# Altium PCB watch.PcbDoc
Units mm, origin at the board's own origin, x right, y up, seen from the top; angles counter-clockwise.
Board outline 35.56 x 36.83 mm, 2 copper layers (Top, Bottom), stack 1.572 mm thick; 52 components, 44 nets, 236 pads, 69 vias.
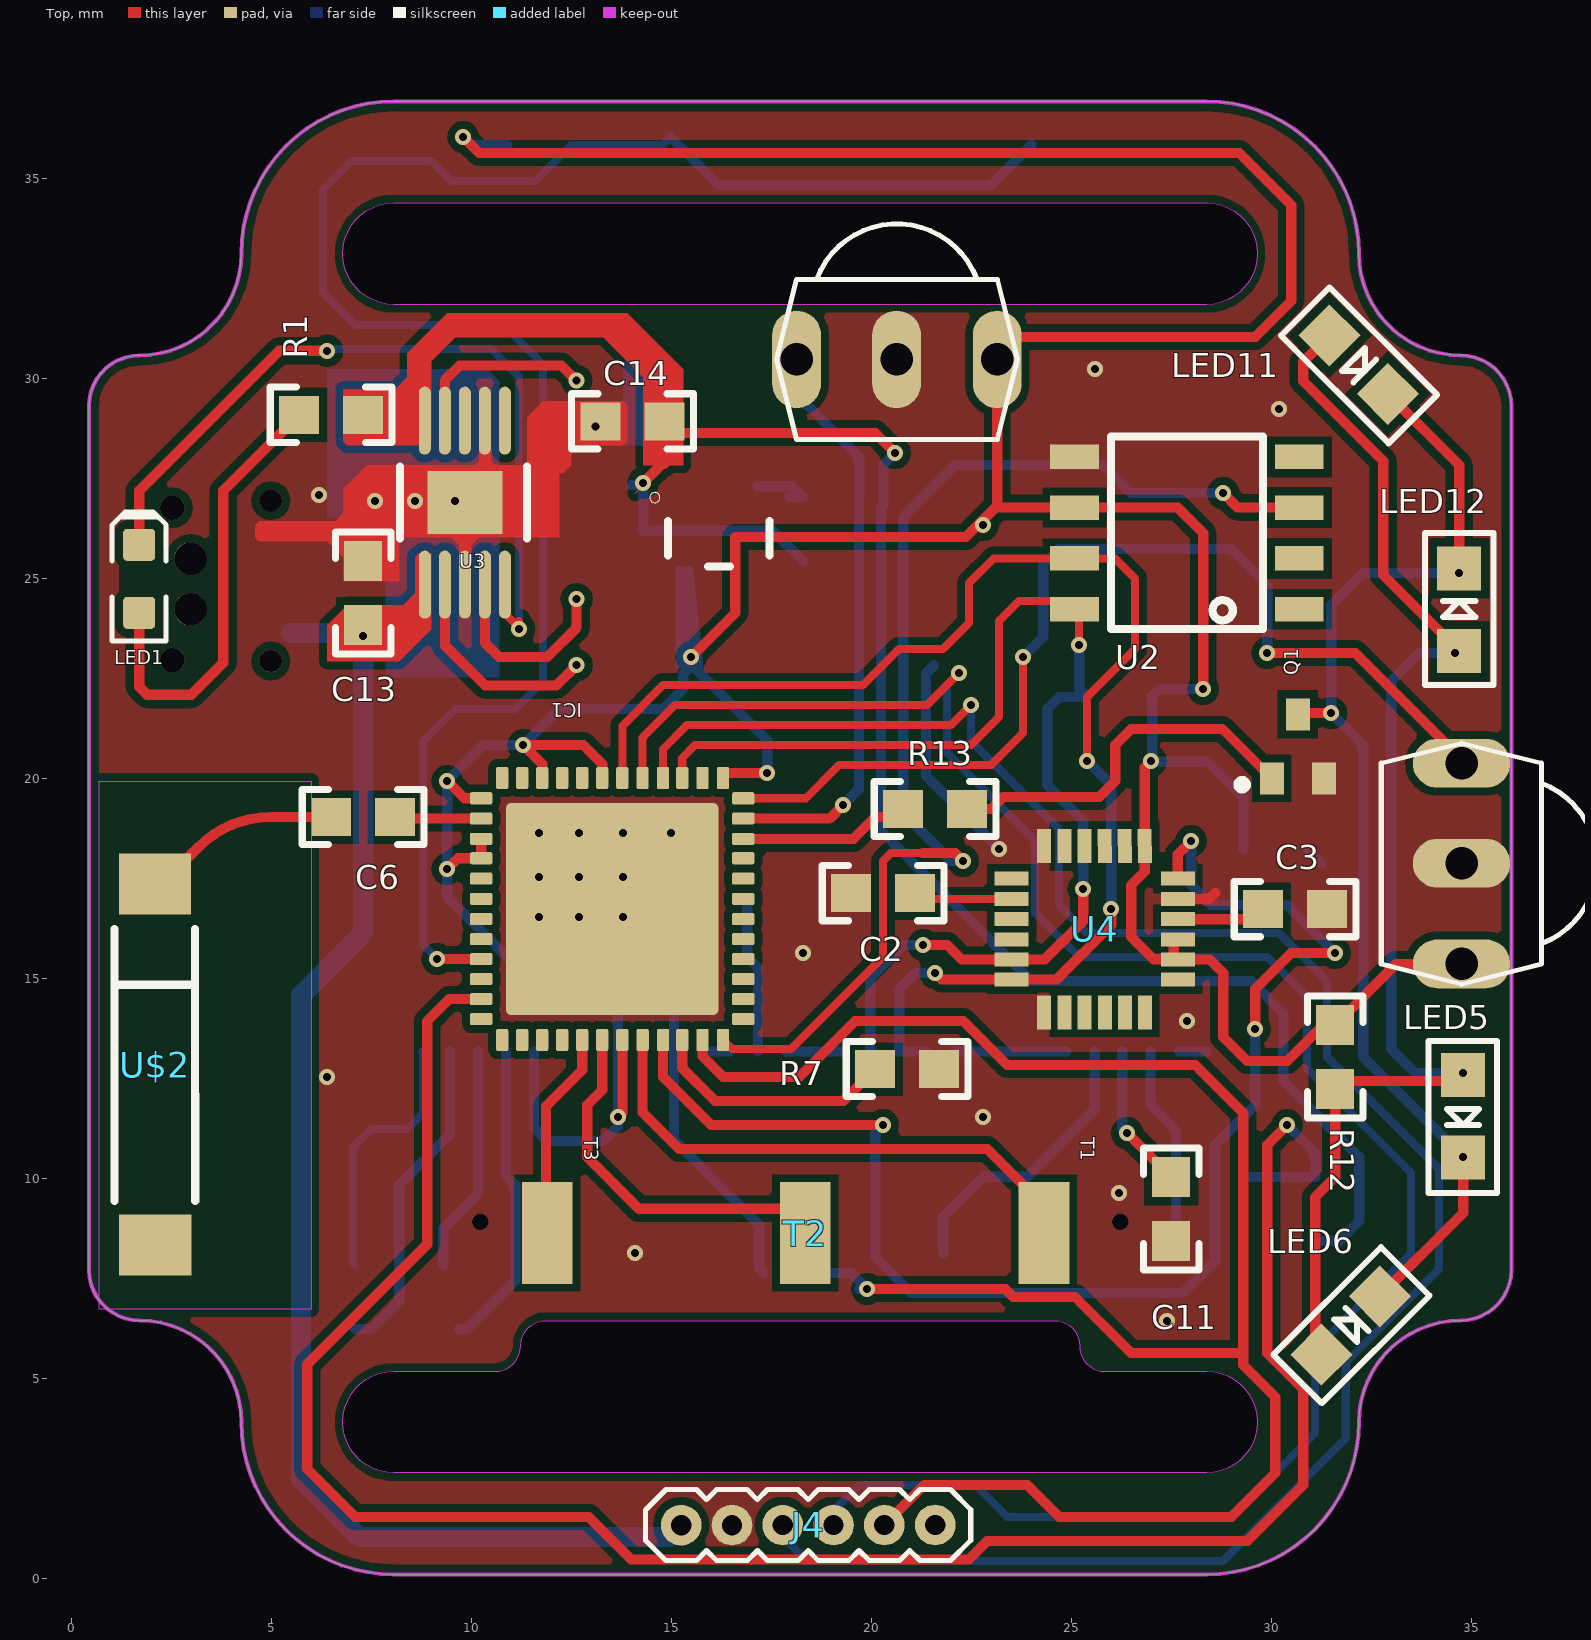
[diagram p0: Top view]
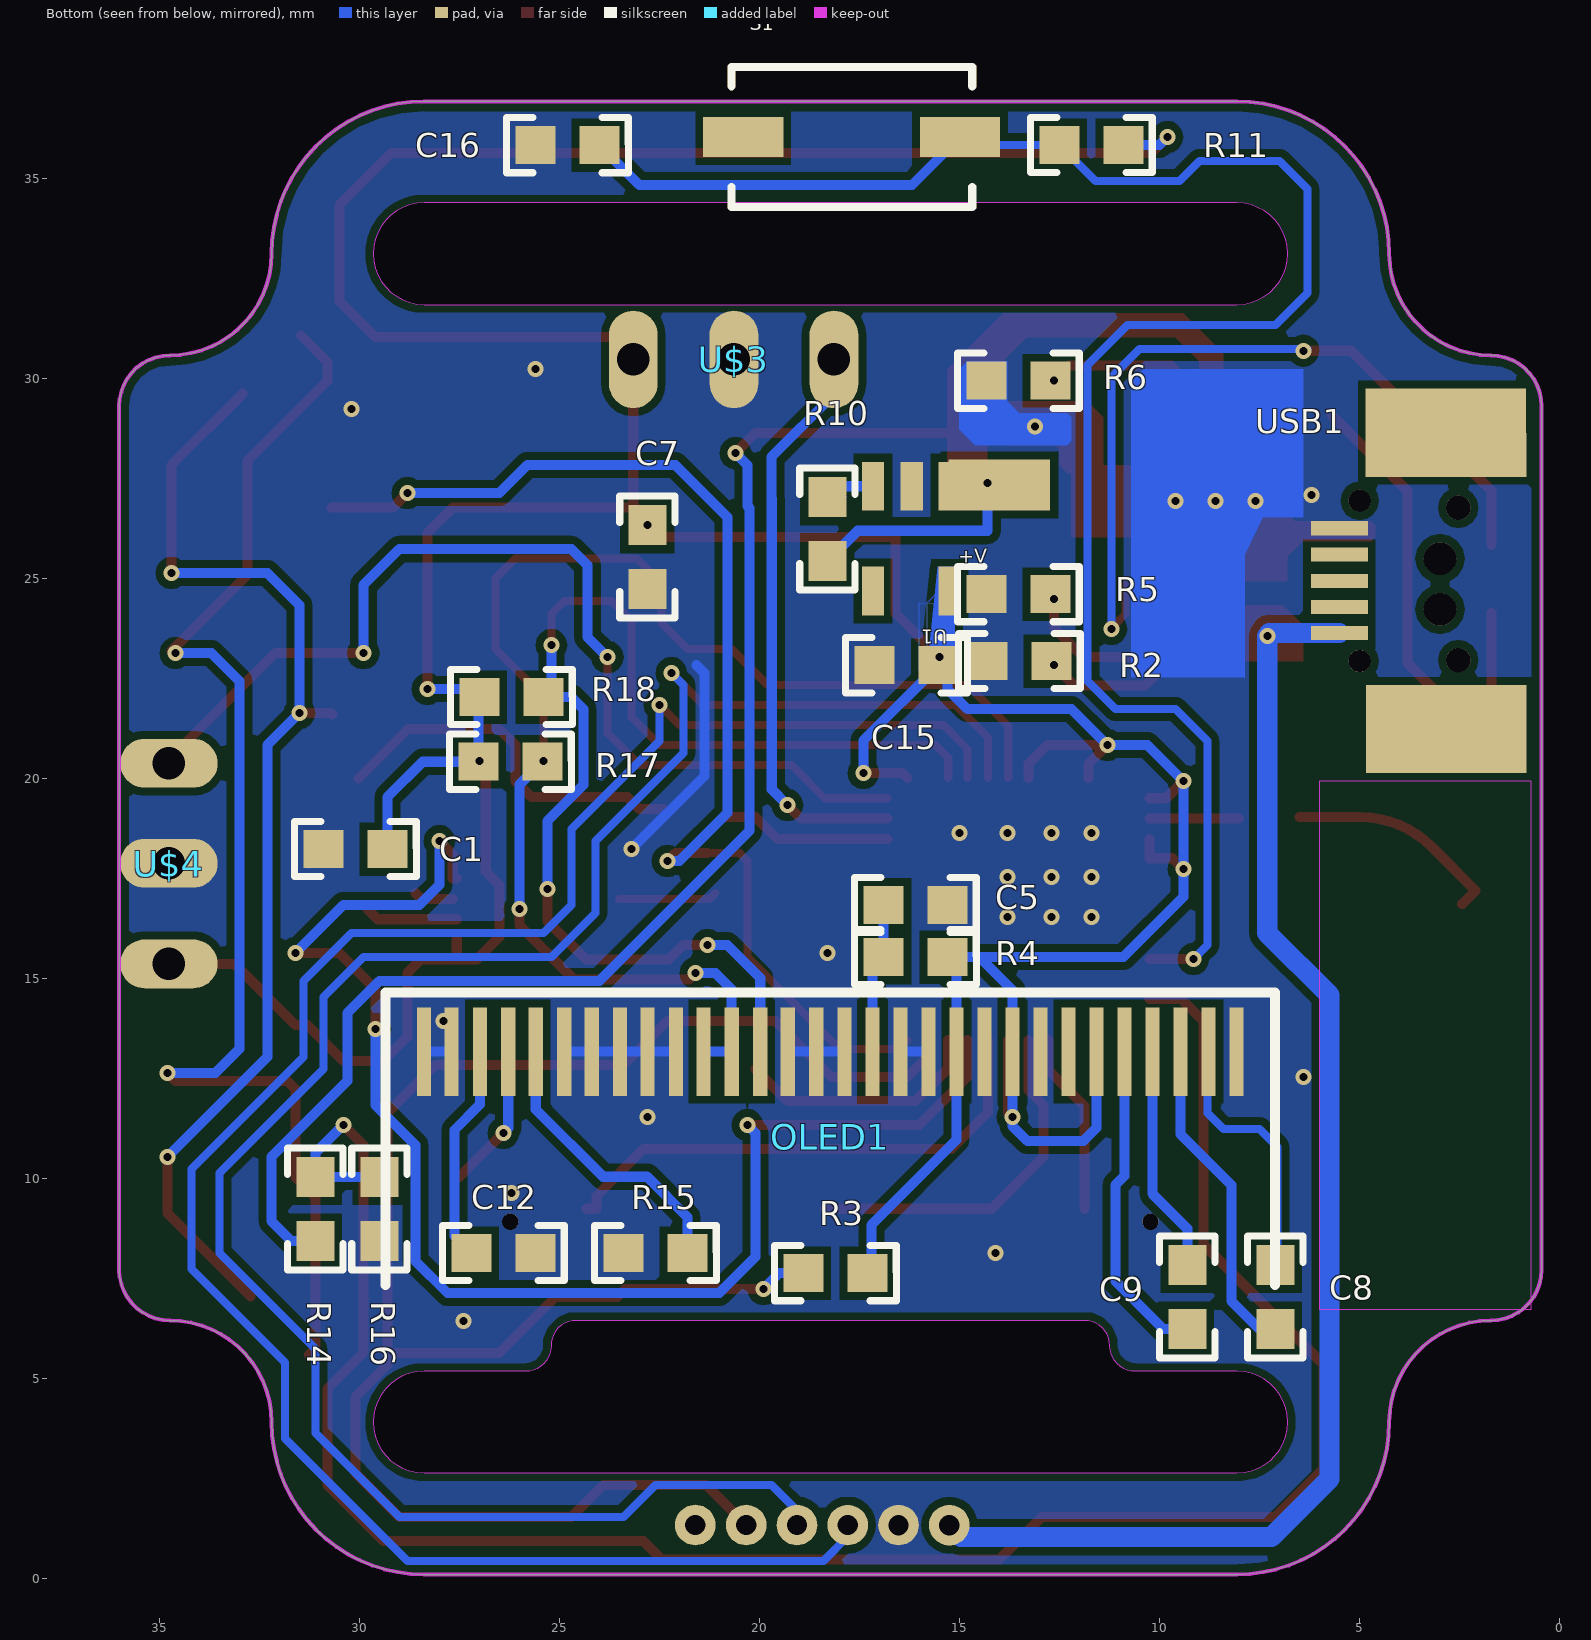
[diagram p1: Bottom view, seen from below]

## Layer stack, top to bottom
Top Solder: solder mask 0.0102, Solder Resist, Dk 3.5
Top: signal copper 0.0356
Dielectric 1: core 1.5011, FR-4, Dk 4.8
Bottom: signal copper 0.0356
Bottom Solder: solder mask 0.0102, Solder Resist, Dk 3.5

## Board outline
0.444,7.727 0.444,29.317 cw(c1.714,29.317) 1.714,30.587 ccw(c1.714,33.127) 4.254,33.127 cw(c8.064,33.127) 8.064,36.937 28.384,36.937 cw(c28.384,33.127) 32.194,33.127 ccw(c34.734,33.127) 34.734,30.587 cw(c34.734,29.317) 36.004,29.317 36.004,7.727 cw(c34.734,7.727) 34.734,6.457 ccw(c34.734,3.917) 32.194,3.917 cw(c28.384,3.917) 28.384,0.107 8.064,0.107 cw(c8.064,3.917) 4.254,3.917 ccw(c1.714,3.917) 1.714,6.457 cw(c1.714,7.727)
cut-out: 8.064,34.397 28.384,34.397 cw(c28.384,33.127) 29.654,33.127 cw(c28.384,33.127) 28.384,31.857 8.064,31.857 cw(c8.064,33.127) 6.794,33.127 cw(c8.064,33.127)
cut-out: 28.384,5.187 cw(c28.384,3.917) 29.654,3.917 cw(c28.384,3.917) 28.384,2.647 8.064,2.647 cw(c8.064,3.917) 6.794,3.917 cw(c8.064,3.917) 8.064,5.187 10.604,5.187 ccw(c10.604,5.822) 11.239,5.822 cw(c11.874,5.822) 11.874,6.457 24.574,6.457 cw(c24.574,5.822) 25.209,5.822 ccw(c25.844,5.822) 25.844,5.187

## Design rules (kind name [scope] priority, off if disabled: settings)
Clearance [All] p1: gap=0.2 ignorepadtopadclearanceinfootprint=FALSE except(0: Arc-Hole Track-Hole SMDPad-Hole THPad-Hole Via-Hole Fill-Hole Poly-Hole Region-Hole Text-Hole)
HoleSize HoleSize_1 [All] p1: absolutevalues=TRUE maxlimit=2540 minlimit=0.33 maxpercent=80.000 minpercent=20.000
HoleSize [All] p2: absolutevalues=TRUE maxlimit=2.54 minlimit=0.025 maxpercent=80.000 minpercent=20.000
HoleToHoleClearance mdViaViaSameLayer [All] p1: gap=0.203 allowstackedmicrovias=TRUE
HoleToHoleClearance [All] p2: gap=0.254 allowstackedmicrovias=TRUE
PasteMaskExpansion mlMinCreamFrame [All] p1: expansion=0
PasteMaskExpansion [All] p2: expansion=0
PolygonConnect PolygonConnect_VIA [InNet('GND')] p1: connectstyle=Direct reliefconductorwidth=0.254 reliefentries=4 polygonreliefangle="90 Angle" airgapwidth=0.254
PolygonConnect [All] p2: connectstyle=Relief reliefconductorwidth=0.254 reliefentries=4 polygonreliefangle="90 Angle" airgapwidth=0.254
RoutingVias [All] p1: holewidth=0.711 width=1.27 viastyle="Through Hole" minholewidth=0.711 minwidth=1.27 maxholewidth=0.711 maxwidth=1.27
SilkToSilkClearance [All] p1 off: silktosilkclearance=0.254
SilkToSolderMaskClearance [IsPad] p1 off: minsilkscreentomaskgap=0.254 clearancetoexposedcopper=TRUE
SolderMaskExpansion mlMinStopFrame [All] p1: expansion=0.102
SolderMaskExpansion [All] p2: expansion=0.102
Width Width_1 [All] p1: maxlimit=2540 minlimit=0.152 preferedwidth=0.254
Width [All] p2: maxlimit=0.254 minlimit=0.254 preferedwidth=0.254
25 further rules are at their usual default settings.

## Components (designator, comment, footprint, x,y, rotation, side; value= is the part's Value field where it differs from the comment)
C1 "0.01uf" 0603 30.1,18.244 r179.99 bottom
C2 "2.2nf" 0603 20.3,17.144 r180.01 top
C3 "0.1uf" 0603 30.6,16.744 r180.02 top
C5 "100n" 0603 16.1,16.844 r180 bottom
C6 "0.01uf" 0603 7.3,19.044 r0.01 top
C7 "100n" 0603 22.8,25.544 r270 bottom
C8 "1u" 0603 7.1,7.044 r89.98 bottom
C9 "1u" 0603 9.3,7.044 r89.98 bottom
C11 "4u7" 0603 27.5,9.244 r270 top
C12 "2u2" 0603 26.4,8.144 r180 bottom
C13 "10uF" 0603 7.3,24.644 r270.01 top
C14 "10uF" 0603 14.033,28.936 r180.01 top
C15 "10uF" 0603 16.319,22.84 r0 bottom
C16 "100n" 0603 24.8,35.844 r359.98 bottom
IC1 "CY8C29666_QFN48" QFN48 13.525,16.744 r0 top
J4 "CONN_061.27MM" 1X06_1.27MM 21.6,1.344 r180.02 top
LED1 "LED_GREEN" led0603 1.7,25 r90 top
LED5 "LED0805" CHIPLED_0805 34.8,11.544 r180 top
LED6 "LED0805" CHIPLED_0805 32,6.344 r315 top
LED11 "LED0805" CHIPLED_0805 32.2,30.344 r225 top
LED12 "LED0805" CHIPLED_0805 34.7,24.244 r0 top
OLED1 "DISP_OLED_UG-2864HSWEG01_NOOUTLINEWATCH" ? 18.224,14.331 r0 top
Q1 "MMBT2222A" SOT-323 30.67,20.808 r90 top
R1 "PartNumber" 0603 6.5,29.1 r0 top
R2 "PartNumber" 0603 13.5,22.944 r180 bottom
R3 "10K" 0603 18.1,7.644 r359.99 bottom
R4 "RESISTOR0603" 0603 16.1,15.544 r179.98 bottom
R5 "PartNumber" 0603 13.525,24.618 r180 bottom
R6 "PartNumber" 0603 13.525,29.952 r180 bottom
R7 "10K" 0603 20.9,12.744 r0 top
R10 "100K" 0603 18.3,26.244 r270 bottom
R11 "100K" 0603 11.7,35.844 r180 bottom
R12 "100K" 0603 31.6,13.044 r270 top
R13 "4.7k" 0603 21.6,19.244 r0 top
R14 "100K" 0603 31.1,9.244 r89.99 bottom
R15 "390K" 0603 22.6,8.144 r179.98 bottom
R16 "100K" 0603 29.5,9.244 r270 bottom
R17 "10K" 0603 26.225,20.427 r179.98 bottom
R18 "10K" 0603 26.2,22.044 r179.98 bottom
S1 "DTSM-3" DTSM-3 17.7,36.044 r180 bottom
T1 "SMD2" SMD1,27-2,54#1 24.32,8.644 r180.01 top
T2 "SMD2" SMD1,27-2,54#2 18.351,8.644 r180.01 top
T3 "SMD2" SMD1,27-2,54#1 11.9,8.644 r180.01 top
U1 "3.3V" SOT23-5 16.192,26.015 r0 bottom
U2 "DS3231MZ+" SOIC8_150MIL_SMPAD 27.9,26.144 r90 top
U3 "BQ24090DGQR" DGQ0010D_NV_N 9.842,26.904 r90 top
U4 "MPU-6050" QFN.24.4X4 25.59,16.236 r90.02 top
U$2 "ANTENNA2SMD2" ANTENNA-CHIP3 2.1,12.844 r0.02 top
U$3 "TSOP1838" TSOP18XX 20.637,30.46 r359.99 bottom
U$4 "TSOP1838" TSOP18XX 34.734,17.887 r270 bottom
USB1 "USB-MICROBLARGEPAD" USB-MICROB_LARGEPAD 5.5,24.944 r359.98 bottom
V+ "SMD2" SMD1,27-2,54#3 14,27.344 r90 top

## Footprints (in the part's own frame and the unit in brackets; to place one, negate y for a bottom-side part, rotate by r counter-clockwise, add the part's x,y. Pads: shape width x height; smd on the part's side, far side on the other; paste and mask are expansions set on the pad)
1X06_1.27MM [mil] "1X06_1.27MM"
  round 40 hole 20: 1(0,0) 2(50,0) 3(100,0) 4(150,0) 5(200,0) 6(250,0)
  silkscreen extent -35,-35 285,35
0603 [mm] "0603"
  rect 1x0.95 smd: 1(-0.8,0) 2(0.8,0)
  silkscreen extent -1.52,-0.69 1.52,0.69, body extent -0.87,-0.47 0.87,0.47, height 0.85
ANTENNA-CHIP3 [mil] "ANTENNA-CHIP3"
  rect 71x60 smd: FEED(0,178) NC(0,-177.17)
  silkscreen extent -40,-134 39,134
CHIPLED_0805 [mm] "CHIPLED_0805"
  rect 1.1x1.1 smd: 1(0,-1.05) 2(0,1.016)
  silkscreen extent -0.85,-1.9 0.86,1.91
DGQ0010D_NV_N [mm]
  oval 1.7x0.3 smd paste+0 mask+0.051: 1(-2.05,1) 2(-2.05,0.5) 3(-2.05,0) 4(-2.05,-0.5) 5(-2.05,-1) 6(2.05,-1) 7(2.05,-0.5) 8(2.05,0) 9(2.05,0.5) 10(2.05,1)
  rect 1.57x1.88 smd paste+0 mask+0.051: 11(0,0)
  silkscreen extent -0.9,-1.55 0.9,1.63
DTSM-3 [mm] "DTSM-3"
  rect 2.007x1 smd: 1(-2.7,0) 2(2.718,0)
  silkscreen extent -3,-1.75 3.02,1.75, body extent -3.05,-1.85 3.05,1.85, height 2.5
led0603 [mm]
  round 0.254 on Mech15: 0(0,0)
  rrect25% 0.8x0.8 smd: 1(-0.85,0) 2(0.85,0)
  Top pour cut-out: -0.5,0.5 0.5,0.5 0.5,-0.5 -0.5,-0.5
  silkscreen extent -1.55,-0.67 1.68,0.67, body extent -0.8,-0.4 0.8,0.4, height 0.75
QFN48 [mil] "QFN48"
  rrect30% 22x12 smd: 1(-128.94,109) 2(-128.94,89) 3(-128.94,69) 4(-128.94,50) 5(-128.94,30) 6(-128.94,10) 7(-128.94,-9.84) 8(-128.94,-29.53) 9(-128.94,-49.21) 10(-128.94,-68.9) 11(-128.94,-88.58) 12(-128.94,-108.27) 25(129,-108.27) 26(129,-88.58) 27(129,-68.9) 28(129,-49.21) 29(129,-29.53) 30(129,-9.84) 31(129,10) 32(129,30) 33(129,50) 34(129,69) 35(129,89) 36(129,109)
  rrect30% 12x22 smd: 13(-108.27,-128.94) 14(-88.58,-128.94) 15(-68.9,-128.94) 16(-49.21,-128.94) 17(-29.53,-128.94) 18(-9.84,-128.94) 19(10,-128.94) 20(30,-128.94) 21(50,-128.94) 22(69,-128.94) 23(89,-128.94) 24(109,-128.94) 37(109,129) 38(89,129) 39(69,129) 40(50,129) 41(30,129) 42(10,129) 43(-9.84,129) 44(-29.53,129) 45(-49.21,129) 46(-68.9,129) 47(-88.58,129) 48(-108.27,129)
  rrect5% 209x209 smd: EXP(0,0)
  body extent -120,-120 120,120, height 39
QFN.24.4X4 [mm] "QFN.24.4X4"
  rect 0.85x0.35 smd: 1(-2.075,1.27) 2(-2.075,0.762) 3(-2.075,0.254) 4(-2.075,-0.25) 5(-2.075,-0.75) 6(-2.075,-1.25) 13(2.081,-1.25) 14(2.081,-0.75) 15(2.081,-0.25) 16(2.081,0.254) 17(2.081,0.762) 18(2.081,1.27)
  rect 0.35x0.85 smd: 7(-1.25,-2.075) 8(-0.75,-2.075) 9(-0.25,-2.075) 10(0.254,-2.075) 11(0.762,-2.075) 12(1.27,-2.075) 19(1.27,2.081) 20(0.762,2.081) 21(0.254,2.081) 22(-0.25,2.081) 23(-0.75,2.081) 24(-1.25,2.081)
  body extent -1.8,-1.8 1.7,1.8, height 1
SMD1,27-2,54#1 [mm] "SMD1,27-2,54"
  rect 1.27x2.54 smd paste+0: 1(0,0)
SMD1,27-2,54#2 [mm] "SMD1,27-2,54"
  rect 1.27x2.54 smd: 1(0,0)
SMD1,27-2,54#3 [mm] "SMD1,27-2,54"
  rect 1.27x2.54 smd far side: 1(0,0)
SOIC8_150MIL_SMPAD [mil] "SOIC8_150MIL_SMPAD"
  rect 24x48 smd: 1(-75,-110.24) 2(-25,-110.24) 3(25,-110.24) 4(75,-110.24) 5(75,111) 6(25,111) 7(-25,111) 8(-75,111)
  silkscreen extent -94,-75 95,75, body extent -90,-100 95,100, height 39
SOT23-5 [mil] "SOT23-5"
  rect 22x48 smd: 1(-37.4,-51.18) 2(0,-51.18) 3(38,-51.18) 4(38,52) 5(-37.4,52)
SOT-323 [mm] "Zetex recommended land pattern.  March 2007"
  rect 0.8x0.6 smd: 1(-0.8,0.65) 2(-0.8,-0.65) 3(0.8,0)
  silkscreen extent -1.05,1.31 -0.86,1.49, body extent -1.13,-1.13 1.12,1.12, height 1.13
TSOP18XX [mil] "TSOP18XX"
  oval 48x96 hole 32: GND(-0.05,-1.05) OUT(-98.47,-1.05) VCC(99,-1.05)
USB-MICROB_LARGEPAD [mil] "USB-MICROB_LARGEPAD"
  round 22 hole 22: 1(-20,78.74) 1(-20,-79)
  rect 56x14 smd: D+(0,0) D-(0,25.59) GND(0,-52) ID(0,-26) VBUS(0,51.18)
  rect 158x87 smd: MT1(-105,145.67) MT2(-105,-146)
? [mil] "UG-2864HSWEG01_1.3_WRAPAROUND_WATCH"
  rect 14x87 smd far side: 1(-399.61,-45.37) 2(-372.05,-45.37) 3(-344.49,-45.37) 4(-316.93,-45.37) 5(-289.37,-45.37) 6(-261.81,-45.37) 7(-234.25,-45.37) 8(-206.69,-45.37) 9(-179.13,-45.37) 10(-151.57,-45.37) 11(-124.02,-45.37) 12(-96.46,-45.37) 13(-68.9,-45.37) 14(-41.34,-45.37) 15(-13.78,-45.37) 16(14,-45.37) 17(42,-45.37) 18(69,-45.37) 19(97,-45.37) 20(125,-45.37) 21(152,-45.37) 22(180,-45.37) 23(207,-45.37) 24(235,-45.37) 25(262,-45.37) 26(290,-45.37) 27(317,-45.37) 28(345,-45.37) 29(373,-45.37) 30(400,-45.37)
  round 16 hole 16: 1(-314.96,-212.7) 1(315,-212.7)

## Part data
C1 C2 C3 C5 C6 C7 C8 C9 C11 C12 C13 C14 C15 C16: library part CAP_CERAMIC0603, "Ceramic Capacitors0402 - 0402 Surface Mount Capacitors  16pF 50V 5% [Digikey: 445-4899-2-ND]  18pF 50V 5% [Digikey: 490-1281-2-ND]  22pF 50V 5% [Digikey: 490-1283-2-ND]  68pF 50V 5% [Digikey: 490-1289-2-ND]  0.1uF 10V 10% [Digikey: 490-1318-2-ND]  1.0uF 6.3V 10% [Digikey: 490-1320-2-ND]    0603 - 0603 Surface Mount Capacitors  16 pF 50V 5% [Digikey: 445-5051-2-ND]  22 pF 50V [Digikey: PCC220ACVTR-ND]  33 pF 50V 5% [Digikey: 490-1415-1-ND]  56pF 50V 5% [Digikey: 490-1421-1-ND]  220pF 50V 5% [Digikey: 445-1285-1-ND]  680 pF 50V   2200 pF 50V 5% C0G [Digikey: 445-1297-1-ND]  5600 pF 100V 5% X7R [Digikey: 478-3711-1-ND]  0.1 µF 25V 10% [Digikey: PCC2277TR-ND]  0.22 µF 16V 10% X7R [Digikey: 445-1318-1-ND]  1.0 µF 25V 10% [Digikey: 445-5146-2-ND]    0603 - RF Specific  3pF 250V +/-0.1pF RF [Digikey: 712-1347-1-ND]  18 pF 250V 5%  [Digikey: 478-3505-1-ND or 712-1322-1-ND]  56 pF 250V 5% C0G RF [Digikey: 490-4867-1-ND]  68 pF 250V RF [Digikey: 490-4868-1-ND]    0805 - 0805 Surface Mount Capacitors  220 pF 250V 2% RF Ceramic Capacitor [Digikey: 712-1398-1-ND]  1000 pF 50V 2% NP0 Ceramic Capacitor [Digikey: 478-3760-1-ND]  0.1 µF 25V 10% Ceramic Capacitor [Digikey: PCC1828TR-ND]  1.0 µF 16V 10% Ceramic Capacitor[Digikey: 490-1691-2-ND]  10.0 µF 10V 10% Ceramic Capacitor[Digikey: 709-1228-1-ND]  10.0 uF 16V 10% Ceramic Capacitor [Digikey: 478-5165-2-ND]  47 uF 6.3V 20% Ceramic Capacitor [Digikey: 587-1779-1-ND or 399-5506-1-ND]       1206 - 1206 Surface Mount Capacitors  47uF 10V 20% Ceramic Capacitor [Digikey: 490-5528-1-ND or 399-5508-1-ND or 445-6010-1-ND]  100uF 6.3V -20%, +80% Y5V Ceramic Capacitor (Digikey: 490-4512-1-ND, Mouser: 81-GRM31CF50J107ZE1L)"
J4: "Multi connection point. Often used as Generic Header-pin footprint for 0.1 inch spaced/style header connections    On any of the 0.1 inch spaced packages, you can populate with these:  Break Away Headers - Straight (PRT-00116)   Break Away Male Headers - Right Angle (PRT-00553)   Female Headers (PRT-00115)   Break Away Headers - Machine Pin (PRT-00117)   Break Away Female Headers - Swiss Machine Pin (PRT-00743)   Arduino Stackable Header - 6 Pin (PRT-09280)        For SCREWTERMINALS and SPRING TERMINALS visit here:  Screw Terimnals on SparkFun.com (5mm/3.5mm/2.54mm spacing)       This device is also useful as a general connection point to wire up your design to another part of your project. Our various solder wires solder well into these plated through hole pads.  Hook-Up Wire - Assortment (Stranded, 22 AWG) (PRT-11375)   Hook-Up Wire - Assortment (Solid Core, 22 AWG) (PRT-11367)   View the entire wire category on our website here"
LED1: "Typical INFRARED GaAs LED"
LED5 LED6 LED11 LED12: "LED0603 - 0603 Surface Mount Package    2mA: Green LED - Low Power (3.9mcd, 2ma, 1.7Vf) - Digikey: 475-2709-2-ND  Orange LED - Low Power (9.8mcd, 2ma, 1.8Vf) - Digikey: 475-1194-2-ND  Red LED - Low Power (5mcd, 2ma, 1.8Vf) - Digikey: 475-1195-2-ND  Yellow LED - Low Power (7mcd, 2ma, 1.8Vf) - Digikey: 475-1196-2-ND       5mA: Blue LED - Low Power (17mcd, 5ma, 2.9Vf) - Digikey: LNJ937W8CRACT-ND    0805 - 0805 Surface Mount Package    2mA: Red LED (8.8mcd, 2mA, 1.8Vf, Clear) - Low Power [Digikey: 475-2510-1-ND]  Green LED (5mcd, 2mA, 1.8Vf, Clear) - Low Power [Digikey: 475-2730-1-ND]  Yellow LED (11.3mcd, 2mA, 1.8Vf, Clear) - Low Power [Digikey: 475-2555-1-ND]       20mA: Red LED (104mcd, 20mA, Diffused) - LS R976 [Digikey: 475-1278-6-ND]  Red LED (12mcd, 20mA, 2.0Vf, Clear) - APT2012EC [Digikey: 754-1128-1-ND]  Green LED (15mcd, 20mA, 2.2Vf, Clear) - APT2012GC [Digikey: 754-1131-1-ND]  Orange LED (160mcd, 20mA, 2.1Vf, Clear) - APT2012SECK [Digikey: 754-1130-1-ND]     1206 - 1206 Surface Mount Package  Green LED (26mcd, 20mA, Diffused) - LG N971  [Digikey: 475-1407-6-ND]  Red LED (15mcd, 20mA, Diffused) - LH N974 [Digikey: 475-1416-6-ND]"
Q1: "NPN switching transistor  40V 600mA SOT23"
R1: library part RC0603JR-071K5L, "RES SMD 1.5K OHM 5% 1/10W 0603"
R2: library part RC0603JR-07510RL, "RES SMD 510 OHM 5% 1/10W 0603"
R3 R7 R10 R11 R12 R13 R14 R15 R16 R17 R18: library part RESISTOR0603, "Resistors0402 - 0402 Surface Mount Package  22 Ohm 1% 1/16W [Digikey: 311-22.0LRTR-ND]  33 Ohm 5% 1/16W  1.0K 5% 1/16W  1.5K 5% 1/16W  2.0K 1% 1/16W  10.0K 1% 1/16W [Digikey: 311-10.0KLRTR-ND]  10.0K 5% 1/16W [Digikey: RMCF0402JT10K0TR-ND]  12.1K 1% 1/16W [Digikey: 311-22.0LRTR-ND]  100.0K 5% 1/16W    0603 - 0603 Surface Mount Package  0 Ohm 1/10 Watt 1% Resistor  15 Ohm 1/10 Watt 1% Resistor  33 Ohm 1/10 Watt 1% Resistor  49.9 Ohm 1/10 Watt 1% Resistor  100 Ohm 1/10 Watt 1% Resistor  150 Ohm 1/10 Watt 1% Resistor  240 Ohm 1/10 Watt 1% Resistor  390 Ohm 1/10 Watt 1% Resistor  560 Ohm 1/10 Watt 1% Resistor  680 Ohm 1/10 Watt 1% Resistor  750 Ohm 1/10 Watt 1% Resistor  1.0K Ohm 1/10 Watt 1% Resistor  1.5K Ohm 1/10 Watt 1% Resistor  2.0K Ohm 1/10 Watt 1% Resistor  2.2K Ohm 1/10 Watt 1% Resistor  3.3K Ohm 1/10 Watt 1% Resistor  4.7K Ohm 1/10 Watt 1% Resistor  10.0K Ohm 1/10 Watt 1% Resistor  12.0K Ohm 1/10 Watt 1% Resistor  12.1K Ohm 1/10 Watt 1% Resistor  20.0K Ohm 1/10 Watt 1% Resistor  33.0K Ohm 1/10 Watt 1% Resistor  100.0K Ohm 1/10 Watt 1% Resistor    0805 - 0805 Surface Mount Package  0 Ohm 1/8 Watt 1% Resistor  33 Ohm 1/8 Watt 1% Resistor  100 Ohm 1/8 Watt 1% Resistor  150 Ohm 1/8 Watt 1% Resistor  200 Ohm 1/8 Watt 1% Resistor  240 Ohm 1/8 Watt 1% Resistor  330 Ohm 1/8 Watt 1% Resistor  390 Ohm 1/8 Watt 1% Resistor  470 Ohm 1/8 Watt 1% Resistor  1.0K Ohm 1/8 Watt 1% Resistor  1.5K Ohm 1/8 Watt 1% Resistor  2.0K Ohm 1/8 Watt 1% Resistor  4.7K Ohm 1/8 Watt 1% Resistor  5.1K Ohm 1/8 Watt 1% Resistor  5.6K Ohm 1/8 Watt 1% Resistor  10.0K Ohm 1/8 Watt 1% Resistor  22.0K Ohm 1/8 Watt 1% Resistor  33.0K Ohm 1/8 Watt 1% Resistor  100K Ohm 1/8 Watt 1% Resistor    1206 - 1206 Surface Mount Package  2012 - 2010 Surface Mount Package  0.11 Ohm 1/2 Watt 1% Resistor - Digikey: RHM.11UCT-ND"
R4: "Resistors0402 - 0402 Surface Mount Package  22 Ohm 1% 1/16W [Digikey: 311-22.0LRTR-ND]  33 Ohm 5% 1/16W  1.0K 5% 1/16W  1.5K 5% 1/16W  2.0K 1% 1/16W  10.0K 1% 1/16W [Digikey: 311-10.0KLRTR-ND]  10.0K 5% 1/16W [Digikey: RMCF0402JT10K0TR-ND]  12.1K 1% 1/16W [Digikey: 311-22.0LRTR-ND]  100.0K 5% 1/16W    0603 - 0603 Surface Mount Package  0 Ohm 1/10 Watt 1% Resistor  15 Ohm 1/10 Watt 1% Resistor  33 Ohm 1/10 Watt 1% Resistor  49.9 Ohm 1/10 Watt 1% Resistor  100 Ohm 1/10 Watt 1% Resistor  150 Ohm 1/10 Watt 1% Resistor  240 Ohm 1/10 Watt 1% Resistor  390 Ohm 1/10 Watt 1% Resistor  560 Ohm 1/10 Watt 1% Resistor  680 Ohm 1/10 Watt 1% Resistor  750 Ohm 1/10 Watt 1% Resistor  1.0K Ohm 1/10 Watt 1% Resistor  1.5K Ohm 1/10 Watt 1% Resistor  2.0K Ohm 1/10 Watt 1% Resistor  2.2K Ohm 1/10 Watt 1% Resistor  3.3K Ohm 1/10 Watt 1% Resistor  4.7K Ohm 1/10 Watt 1% Resistor  10.0K Ohm 1/10 Watt 1% Resistor  12.0K Ohm 1/10 Watt 1% Resistor  12.1K Ohm 1/10 Watt 1% Resistor  20.0K Ohm 1/10 Watt 1% Resistor  33.0K Ohm 1/10 Watt 1% Resistor  100.0K Ohm 1/10 Watt 1% Resistor    0805 - 0805 Surface Mount Package  0 Ohm 1/8 Watt 1% Resistor  33 Ohm 1/8 Watt 1% Resistor  100 Ohm 1/8 Watt 1% Resistor  150 Ohm 1/8 Watt 1% Resistor  200 Ohm 1/8 Watt 1% Resistor  240 Ohm 1/8 Watt 1% Resistor  330 Ohm 1/8 Watt 1% Resistor  390 Ohm 1/8 Watt 1% Resistor  470 Ohm 1/8 Watt 1% Resistor  1.0K Ohm 1/8 Watt 1% Resistor  1.5K Ohm 1/8 Watt 1% Resistor  2.0K Ohm 1/8 Watt 1% Resistor  4.7K Ohm 1/8 Watt 1% Resistor  5.1K Ohm 1/8 Watt 1% Resistor  5.6K Ohm 1/8 Watt 1% Resistor  10.0K Ohm 1/8 Watt 1% Resistor  22.0K Ohm 1/8 Watt 1% Resistor  33.0K Ohm 1/8 Watt 1% Resistor  100K Ohm 1/8 Watt 1% Resistor    1206 - 1206 Surface Mount Package  2012 - 2010 Surface Mount Package  0.11 Ohm 1/2 Watt 1% Resistor - Digikey: RHM.11UCT-ND"
R5 R6: library part RC0603JR-0710KL, "RES SMD 10K OHM 5% 1/10W 0603"
T1 T2 T3 V+: "SMD PAD"
U1: library part V_REG_AP2112K-3.3V, "AP2112 - 600mA CMOS LDO Regulator w/ Enable    The AP2112 is CMOS process low dropout linear regulator with enable function, the regulator delivers a guaranteed 600mA (min.) continuous load current.   Features  Output Voltage Accuracy: ±1.5%   Output Current: 600mA (Min.)   Foldback Short Current Protection: 50mA   Enable Function to Turn ON/OFF VOUT  Low Dropout Voltage (3.3V): 250mV (Typ.) @IOUT=600mA   Excellent Load Regulation: 0.2%/A (Typ.)   Excellent Line Regulation: 0.02%/V (Typ.)   Low Quiescent Current: 55µA (Typ.)  Low Standby Current: 0.01µA (Typ.)  Low Output Noise: 50µVRMS   PSRR: 100Hz -65dB, 1kHz -65dB    OTSD Protection   Stable  with  1.0µF Flexible Cap: Ceramic, Tantalum and Aluminum Electrolytic   Operation Temperature Range: -40°C to 85°C   ESD: MM 400V, HBM 4000V"
U2: library part DS3231MZ+SMPAD
U3: "Single Cell Li-Ion and Li-Pol Battery Charger"
U$2: "Chip antenna   Single endded antenna. Common with smaller chip antennas. CHIP4 package is the GPS Chip Antenna SKU: GPS-08418. CHIP5 package is 2.4GHz chip antenna SKU: WRL-00144."
U$3 U$4: "IR Receiver and Demodulator"

## Free pads (board coordinates)
  round 0.61 hole 0.61: 1(2.527,22.967) 1(2.527,26.777)
  round 0.813 hole 0.813: 1(2.984,24.237) 1(2.984,25.507)

## Via types
v1: diameter 0.4, hole 0.2, Top to Bottom, tented both sides, 68 vias
v2: diameter 0.4, hole 0.2, Top to Bottom, 1 vias

## Nets (pads, with @x,y where several pads share a name; then routed paths per layer and width w, separated by ;. In a path a pad name is that pad's centre, name@x,y a point inside that pad or via, vN(x,y) a via of type N, cw(c..) or ccw(c..) an arc to the next point about the centre after c; other vN are vias at no path point)
3.3V: C1.2 C7.1 C15.1 IC1.1 IC1.3 IC1.4 IC1.19 IC1.37 IC1.43 IC1.46 OLED1.6 OLED1.9 OLED1.11 R3.1 R4.2 R11.2 R12.1 R17.1 R18.1 U4.8 U4.9 U4.13 U$3.VCC U$4.VCC | length 127.3
  Top w0.254: v1(9.4,17.744) 9.67,18.014 IC1.4 IC1.3 ; v1(9.4,19.944) 9.831,19.512 IC1.1 ; v1(9.8,36.044) 10.2,35.644 29.2,35.644 30.5,34.344 30.5,31.944 29.6,31.044 23.709,31.044 U$3.VCC 23.151,26.827 ; IC1.46 11.775,20.369 v1(11.3,20.844) 12.8,20.844 13.275,20.369 IC1.43 ; v1(13.674,11.544) 13.779,11.649 IC1.19 ; v1(15.5,23.044) 16.6,24.144 16.6,26.044 22.368,26.044 23.151,26.827 ; IC1.37 16.417,20.144 v1(17.4,20.144) ; v1(27,20.444) 26.839,20.283 U4.13 26.839,17.683 26.5,17.344 26.5,16.044 27.057,15.487 27.565,15.487 U4.9@27.565,15.986 ; U4.8 28.457,15.486 28.8,15.144 28.8,13.544 29.4,12.944 30.4,12.944 31.3,13.844 R12.1 33.128,15.372 U$4.VCC ; v1(28.3,22.244) 28.3,26.144 27.665,26.779 23.2,26.779 23.151,26.827
  Bottom w0.254: v1(9.8,36.044) 10,35.844 R11.2 ; OLED1.6 11.574,11.27 11.9,10.944 13.3,10.944 13.674,11.318 v1(13.674,11.544) OLED1.9 13.674,14.718 14.5,15.544 ; R3.1 17.2,7.744 17.2,8.844 15.074,10.97 OLED1.11 15.074,15.318 R4.2 14.5,15.544 ; v1(17.4,20.144) 17.4,20.959 C15.1 15.3,22.621 15.3,22.244 14.8,21.744 12.2,21.744 v1(11.3,20.844) 10.3,20.844 v1(9.4,19.944) v1(9.4,17.744) 9.4,17.044 10.899,15.544 14.5,15.544 ; v1(28.3,22.244) 27.2,22.244 R18.1 27.025,22.019 R17.1 28.417,20.427 29.3,19.544 C1.2 ; U$4.VCC@34.589,15.544 U$4.VCC
  other v2: 22.8,26.344
ANT: C6.1 | length 5.5
  Top w0.254: 2.093,17.201 2.096,17.204 ; 2.426,16.871 2.096,17.201 2.096,17.204 ; C6.1 4.988,19.044 ccw(c4.988,16.504) 3.192,18.3 2.096,17.204
BAT_VOL: IC1.11 R14.2 R16.1 | length 53.4
  Top w0.254: IC1.11 9.45,14.494 8.9,13.944 8.9,8.36 5.9,5.36 5.9,2.744 7.1,1.544 12.94,1.544 14,0.484 22.44,0.484 22.9,0.944 29.4,0.944 30.8,2.344 30.8,4.744 29.9,5.644 29.9,10.844 v1(30.4,11.344)
  Bottom w0.254: R16.1 R14.2 31.1,10.644 v1(30.4,11.344)
CHG_N: U3.8
GND: C1.1 C2.2 C3.1 C5.2 C7.2 C11.2 C12.2 C13.1 C14.2 C15.2 C16.2 IC1.EXP J4.5 OLED1.1 OLED1.8 OLED1.10 OLED1.12 OLED1.13 OLED1.15 OLED1.16 OLED1.17 OLED1.21 OLED1.22 OLED1.23 OLED1.24 OLED1.25 OLED1.29 OLED1.30 Q1.2 R2.1 R5.1 R6.1 R7.2 R15.1 R16.2 U1.2 U2.5 U3.3 U3.7 U3.11 U4.1 U4.11 U4.18 U$3.GND U$4.GND USB1.GND | length 12.5
  Top w0.254: U4.11 28.454,16.998 28.6,17.144
  Bottom w0.254: OLED1.12 OLED1.13 ; OLED1.15 OLED1.16 OLED1.17 ; 21.573,22.839 21.373,22.639 21.373,20.071 v1(23.2,18.244) ; OLED1.21 OLED1.22 OLED1.23 OLED1.24 OLED1.25 ; OLED1.29 OLED1.30 ; C1.1 C1.1@31.255,17.888
  other v1: 27.4,6.444 14.1,8.144 26.2,9.644 22.8,11.544 6.4,12.544 27.9,13.944 18.3,15.644 11.7,16.544 12.7,16.544 13.8,16.544 11.7,17.544 12.7,17.544 13.8,17.544 11.7,18.644 12.7,18.644 13.8,18.644 15,18.644 7.6,26.944 8.6,26.944 9.6,26.944 6.2,27.1 13.106,28.809 30.2,29.244 25.6,30.244
I_SET: R2.2 U3.2 | length 5.2
  Top w0.254: U3.2@9.342,24.6 9.342,23.34 10.35,22.332 12.128,22.332 v1(12.636,22.84)
IO0: IC1.23 J4.2 R3.2 | length 47.4
  Top w0.254: IC1.23 15.785,13.058 16.3,12.544 18.2,12.544 19.6,13.944 22.3,13.944 23.4,12.844 28.1,12.844 29.3,11.644 29.3,5.644 ; v1(19.9,7.244) 23.352,7.244 23.549,7.047 25.097,7.047 26.5,5.644 29.3,5.644 ; J4.2 21.33,2.344 23.9,2.344 24.7,1.544 29,1.544 30.1,2.644 30.1,4.544 29.3,5.344 29.3,5.644
  Bottom w0.254: R3.2 19.5,7.644 v1(19.9,7.244) v1@19.7,7.244
IO2: IC1.22 R7.1 | length 6.2
  Top w0.254: IC1.22 15.277,12.766 16.1,11.944 19.3,11.944 R7.1
IRLED: IC1.34 R13.1 | length 4.2
  Top w0.254: IC1.34 19.552,18.496 20.1,19.044 R13.1@20.8,19.044
IRREV1: IC1.36 U$4.OUT | length 26
  Top w0.203: IC1.36 18.368,19.512 19.2,20.344 23,20.344 23.8,21.144 v1(23.8,23.044)
  Top w0.254: v1(29.9,23.144) 32.1,23.144 34.76,20.483 U$4.OUT
  Bottom w0.254: v1(23.8,23.044) 24.3,23.544 24.3,25.344 24.7,25.744 29,25.744 29.9,24.844 v1(29.9,23.144)
IRREV2: IC1.35 U$3.OUT | length 14.6
  Top w0.254: IC1.35 18.96,19.004 v1(19.3,19.344)
  Bottom w0.254: U$3.OUT 18.136,29.608 19.7,28.044 19.7,27.011 19.692,27.003 19.692,19.736 v1(19.3,19.344)
LNA: C6.2 IC1.2 | length 2.2
  Top w0.254: C6.2@8.013,19.004 IC1.2
MPUINT: IC1.21 U4.12 | length 35.6
  Top w0.254: IC1.21 14.795,12.549 16,11.344 v1(20.3,11.344) ; U4.12 27.664,18.108 v1(28,18.444) ; v1(29.6,13.744) 29.6,14.744 30.5,15.644 v1(31.6,15.644)
  Bottom w0.254: v1(20.3,11.344) 20.1,11.144 20.1,8.044 21,7.144 27.797,7.144 28.6,7.947 28.6,10.844 29.6,11.844 v1(29.6,13.744) ; v1(28,18.444) 28,17.344 28.5,16.844 30.4,16.844 v1(31.6,15.644)
NetC2_1: C2.1 U4.20 | length 2.5
  Top w0.2: C2.1 21.247,16.997 U4.20
NetC3_2: C3.2 U4.10 | length 2.3
  Top w0.254: U4.10@27.565,16.49 29.547,16.49 C3.2
NetC5_1: C5.1 OLED1.14 R4.1 | length 3.8
  Bottom w0.254: C5.1 R4.1 17.174,15.27 OLED1.14
NetC8_1: C8.1 OLED1.3 | length 8.2
  Bottom w0.254: C8.1 7.5,6.244 8.2,6.944 8.2,9.844 9.474,11.118 OLED1.3
NetC8_2: C8.2 OLED1.2 | length 6.6
  Bottom w0.2: C8.2 7.048,7.896 7.048,10.792 7.5,11.244 8.4,11.244 8.8,11.644 8.8,13.152 OLED1.2
NetC9_1: C9.1 OLED1.5 | length 7.7
  Bottom w0.254: C9.1@9.699,6.244 9.9,6.244 11.1,7.444 11.1,9.844 10.874,10.07 OLED1.5
NetC9_2: C9.2 OLED1.4 | length 5.7
  Bottom w0.254: C9.2 9.3,8.754 10.174,9.628 OLED1.4
NetC11_1: C11.1 OLED1.27 | length 3.6
  Top w0.254: v1(26.4,11.144) C11.1
  Bottom w0.254: OLED1.27 26.276,11.268 v1(26.4,11.144)
NetC12_1: C12.1 OLED1.28 | length 5.5
  Bottom w0.254: OLED1.28 26.987,11.857 27.622,11.222 27.622,8.566 C12.1
NetLED1_1: LED1.1 R1.1 | length 11.4
  Top w0.254: LED1.1 1.7,22.3 1.9,22.1 3,22.1 3.8,22.9 3.8,27.2 R1.1
NetLED5_1: R12.2 | length 33.2
  Top w0.254: 31.257,5.601 31.1,5.759 31.1,9.544 31.6,10.044 R12.2 31.8,12.444 34.6,12.444 v1(34.8,12.644) ; 31.457,31.086 30.8,30.429 30.8,29.944 32.8,27.944 32.8,25.094 34.7,23.194 v1@34.65,23.194
  Bottom w0.254: v1(34.6,23.144) 33.7,23.144 33,22.444 33,13.244 33.6,12.644 v1(34.8,12.644)
NetLED5_2: Q1.3 | length 24.6
  Top w0.254: Q1.3 30.706,21.644 v1(31.5,21.644) ; 32.918,29.625 34.7,27.844 v1@34.7,25.26
  Bottom w0.254: v1(34.7,25.144) 32.3,25.144 31.5,24.344 v1(31.5,21.644) 32.3,20.844 32.3,13.044 v1(34.8,10.544)
NetOLED1_26: OLED1.26 R15.2 | length 7.2
  Bottom w0.254: R15.2 21.8,9.044 22.806,10.05 23.906,10.05 25.59,11.734 OLED1.26
NetQ1_1: Q1.1 R13.2 | length 9.5
  Top w0.254: R13.2 23,19.244 23.3,19.544 25.7,19.544 26.1,19.944 26.1,20.844 26.5,21.244 28.784,21.244 Q1.1
NetR5_2: R5.2 U3.4 | length 4.7
  Top w0.254: U3.4@10.342,24.6 10.342,23.402 10.7,23.044 11.9,23.044 12.636,23.78 v1(12.636,24.491)
NetR6_2: R6.2 U3.9 | length 4.6
  Top w0.254: U3.9 9.342,29.96 9.715,30.333 12.255,30.333 v1(12.636,29.952)
NetR10_1: R10.1 | length 0.4
  Bottom w0.254: R10.1@17.952,27.044 R10.1 R10.1@18.244,27.1
PG_N: LED1.2 U3.5 | length 20.5
  Top w0.2: U3.5 10.842,24.126 11.112,23.856 11.2,23.944 v1(11.2,23.744)
  Top w0.254: LED1.2 1.7,27.2 5.2,30.7 v1(6.4,30.7)
  Bottom w0.2: v1(6.4,30.7) 6.344,30.7 6.3,30.744 10.5,30.744 11.2,30.044 v1(11.2,23.744)
RESET: C16.1 IC1.9 R11.1 | length 46.6
  Top w0.254: v1(9.15,15.494) IC1.9
  Bottom w0.2: v1(9.15,15.494) 8.8,15.844 8.8,20.944 9.6,21.744 11.1,21.744 11.8,22.444 11.8,30.344 10.8,31.344 7.1,31.344 6.3,32.144 6.3,34.744 7,35.444 9,35.444 9.5,34.944 11.6,34.944 R11.1 14.782,35.844 14.982,36.044
  Bottom w0.254: 14.982,36.044 16.182,34.844 22.999,34.844 C16.1
RTC_INT: IC1.24 | length 29.9
  Top w0.203: IC1.24 16.518,13.244 18,13.244 20.3,15.544 20.3,17.944 20.5,18.144 21.3,18.144
  Top w0.254: 21.3,18.144 22.1,18.144 v1(22.3,17.944) ; v1(28.8,27.144) 29.165,26.779 30.7,26.779
  Bottom w0.254: v1(22.3,17.944) 22,17.944 20.8,19.144 20.8,26.544 22.1,27.844 25.8,27.844 26.5,27.144 v1(28.8,27.144)
RXD: IC1.40 J4.4 | length 51.7
  Top w0.203: IC1.40 14.795,20.739 15.4,21.344 22,21.344 v1(22.5,21.844)
  Bottom w0.203: J4.4 17.79,1.054 18.4,0.444 28.8,0.444 31.863,3.507 31.863,5.407 34.2,7.744 34.2,10.244 31.4,13.044 31.4,14.944 30.2,16.144 25.4,16.144 24.7,16.844 24.7,18.744 22.5,20.944 v1(22.5,21.844)
SCL: IC1.39 OLED1.18 R18.2 U4.23 | length 30.6
  Top w0.203: IC1.39 15.277,20.521 15.6,20.844 22.5,20.844 23.2,21.544 23.2,23.944 23.7,24.444 24.875,24.444 25.08,24.239 25.2,24.119 v1(25.2,23.344)
  Top w0.254: v1(21.3,15.844) 21.9,15.844 22.258,15.485 U4.23 24.341,15.485 25.3,16.444 v1(25.3,17.244)
  Bottom w0.254: OLED1.18 19.976,15.02 20.8,15.844 v1(21.3,15.844) ; v1(25.2,23.344) 25.2,22.244 R18.2 24.7,22.044 24.4,21.744 24.4,19.844 25.3,18.944 v1(25.3,17.244)
SDA: IC1.42 OLED1.19 OLED1.20 R17.2 U4.24 | length 34.4
  Top w0.203: IC1.42 13.779,21.323 14.8,22.344 19.8,22.344 20.7,23.244 21.8,23.244 22.45,23.894 22.45,24.894 23.065,25.509 25.08,25.509 26.1,25.509 26.6,25.009 26.6,23.244 25.4,22.044 v1(25.4,20.444)
  Top w0.254: v1(21.6,15.144) 21.758,14.985 U4.24 24.641,14.985 26,16.344 v1(26,16.744)
  Bottom w0.254: OLED1.20 OLED1.19 20.7,13.191 20.7,14.744 21.1,15.144 v1(21.6,15.144) ; R17.2 26,19.852 v1(26,16.744)
STAT1: IC1.14
STAT2: IC1.15
T1: IC1.20 T1.1 | length 13
  Top w0.254: IC1.20 14.287,11.657 15.2,10.744 22.9,10.744 24.073,9.57 24.073,9.251 T1.1@24.32,9.251
T2: IC1.18 T2.1 | length 9.1
  Top w0.254: IC1.18 13.275,12.219 12.9,11.844 12.9,10.544 14.193,9.251 T2.1@18.351,9.251
T3: IC1.17 T3.1 | length 4.6
  Top w0.254: T3.1@11.874,9.251 11.874,11.818 12.775,12.719 IC1.17
TXD: IC1.41 J4.3 | length 51.1
  Top w0.203: IC1.41 14.287,21.031 15.1,21.844 21.4,21.844 v1(22.2,22.644)
  Bottom w0.2: J4.3 19.06,1.704 19.7,2.344 22.6,2.344 23.4,1.544 29,1.544 31.1,3.644 31.1,5.744 33.5,8.144 33.5,10.144 30.9,12.744 30.9,14.544 29.9,15.544 25.2,15.544 24.1,16.644 24.1,18.444 21.9,20.644 21.9,22.344 v1(22.2,22.644)
VCC: C13.2 J4.6 U3.1 | length 36.1
  Top w0.254: v1(7.3,23.571) 8.16,23.571 8.842,24.253 U3.1
  Bottom w0.508: 5.499,23.644 v1@7.25,23.644 ; v1(7.3,23.571) 7.3,16.144 5.746,14.59 5.746,2.498 7.2,1.044 14.952,1.044 J4.6
VOUT: C14.1 R1.2 R10.2 R14.1 U3.10 V+.1 | length 54.2
  Top w0: 14.1,27.144 v1@14.328,27.372
  Top w0.254: R1.2@7.3,29.244 7.59,28.954 U3.10 8.842,30.686 9.5,31.344 13.6,31.344 14.833,30.111 C14.1 ; v1(14.3,27.4) 14.777,27.877 14.833,27.877 C14.1 ; v1(20.6,28.144) 20.1,28.644 15.125,28.644 C14.1
  Bottom w0.254: V+.1 14.244,27.344 v1(14.3,27.4) 14.3,26.2 17.543,26.2 R10.2 ; v1(20.6,28.144) 20.3,27.844 20.3,26.827 20.246,26.773 20.246,18.698 24,14.944 29.5,14.944 30.3,14.144 30.3,12.444 32.2,10.544 32.2,8.944 31.7,8.444 R14.1
pads on no net: IC1.5 IC1.6 IC1.7 IC1.8 IC1.10 IC1.12 IC1.13 IC1.16 IC1.25 IC1.26 IC1.27 IC1.28 IC1.29 IC1.30 IC1.31 IC1.32 IC1.33 IC1.38 IC1.44 IC1.45 IC1.47 IC1.48 J4.1 LED1.0 LED5.1 LED5.2 LED6.1 LED6.2 LED11.1 LED11.2 LED12.1 LED12.2 OLED1.7 S1.1 S1.2 U1.1 U1.3 U1.4 U1.5 U2.1 U2.2 U2.3 U2.4 U2.6 U2.7 U2.8 U3.6 U4.2 U4.3 U4.4 U4.5 U4.6 U4.7 U4.14 U4.15 U4.16 U4.17 U4.19 U4.21 U4.22 U$2.FEED U$2.NC USB1.1 USB1.D+ USB1.D- USB1.ID USB1.MT1 USB1.MT2 USB1.VBUS
copper on no net: | length 5.7
  Top w0.254: 32.718,7.062 34.8,9.144 34.8,10.528
  Bottom w0.254: 17.227,27.315 17.157,27.315 18.029,27.315 18.3,27.044

## Polygon pours and split planes (outlines as drawn)
GND on Bottom "Bottom-GND" (solid, remove dead copper, pour order 0): 0,36.855 36.491,36.855 36.491,0 0,0
no net on Bottom "Bottom-No Net" (solid, pour order 10): 15.8,23.572
3.3V on Bottom "NONET_L02_P008" (solid, remove dead copper, shelved, pour order 8): 15.142,24.394 15.142,22.786 15.1,22.744 15.144,22.7 16,22.7 16,24.4
no net on Bottom "Bottom-No Net 1" (solid, pour order 6): 15.721,23.884
3.3V on Bottom "NONET_L02_P004" (solid, remove dead copper, shelved, pour order 4): 15.5,24.6 15.294,24.394 15.142,24.394 15.142,22.658 15.1,22.7 15.1,22.744 15.8,22.744 15.8,24.4 15.5,24.7
GND on Top "Top-GND" (solid, remove dead copper, pour order 2): 0.035,36.816 36.01,36.816 36.01,-0.039 0.035,-0.039

## Keep-outs
Keep-Out Layer:
  region: 0.7,19.944 6,19.944 6,6.744 0.7,6.744
  lines w0.1: 0.444,7.727 ccw(c1.714,7.727) 1.714,6.457 cw(c1.714,3.917) 4.254,3.917 ccw(c8.064,3.917) 8.064,0.107 28.384,0.107 ccw(c28.384,3.917) 32.194,3.917 cw(c34.734,3.917) 34.734,6.457 ccw(c34.734,7.727) 36.004,7.727 36.004,29.317 ccw(c34.734,29.317) 34.734,30.587 cw(c34.734,33.127) 32.194,33.127 ccw(c28.384,33.127) 28.384,36.937 8.064,36.937 ccw(c8.064,33.127) 4.254,33.127 cw(c1.714,33.127) 1.714,30.587 ccw(c1.714,29.317) 0.444,29.317 0.444,7.727

## Other copper
Top:
  region net VCC: 6.4,23.844 6.9,24.344 8.3,24.344 8.6,24.644 8.6,25.544 8.7,25.644 9,25.644 9,23.744 8.2,22.944 6.4,22.944
  region net GND: 4.6,26.344 4.6,26.044 4.7,25.944 6.4,25.944 6.8,25.544 6.8,24.944 8.2,24.944 8.2,26.144 7.7,26.644 6.8,26.644 6.6,26.444 4.7,26.444
  region net GND: 10,25.544 10,25.844 10.2,26.044 9.5,26.044 9.7,25.844 9.7,25.544
  region net GND: 10.2,28.244 10.2,27.944 10,27.744 10.7,27.744 10.5,27.944 10.5,28.244
  region net GND: 6.8,27.244 6.8,24.944 8.2,24.944 8.2,25.944 8.3,26.044 12.2,26.044 12.2,27.844 7.4,27.844
  region net VOUT: 6.8,29.744 8.1,29.744 8.4,30.044 8.4,30.644 9.4,31.644 13.9,31.644 15.3,30.244 15.3,27.844 14.3,27.844 14.3,30.044 13.3,31.044 9.6,31.044 9,30.444 9,28.444 8.9,28.344 6.9,28.344 6.8,28.444
  region net GND: 11.8,29.444 11.4,29.044 11.4,27.844 11.6,27.644 12.3,27.644 12.5,27.844 12.5,28.244 12.6,28.344 13.8,28.344 13.9,28.444 13.9,29.344 13.8,29.444
Bottom:
  region net 3.3V: 15.111,25.3 15.537,25.3 15.8,22.769 15.111,22.769
  region net GND: 13.8,30.444 13.8,29.444 13.5,29.144 12.3,29.144 12.2,29.044 12.2,28.444 12.3,28.344 14.6,28.344 15,28.744 15,30.244 14.8,30.444
  region net GND: 10.4,30.244 10.7,29.944 10.7,26.044 10.7,22.544 7.892,22.544 7.865,22.517 7.865,25.602 7.413,26.544 6.4,26.544 6.4,30.244

## Silkscreen, mask and mechanical layers (free items; w line width, h text height)
Document:
  lines w0.1: 0.444,7.627 ccw(c1.714,7.627) 1.714,6.357 cw(c1.714,3.817) 4.254,3.817 ccw(c8.064,3.817) 8.064,0.007 28.384,0.007 ccw(c28.384,3.817) 32.194,3.817 cw(c34.734,3.817) 34.734,6.357 ccw(c34.734,7.627) 36.004,7.627 36.004,29.217 ccw(c34.734,29.217) 34.734,30.487 cw(c34.734,33.027) 32.194,33.027 ccw(c28.384,33.027) 28.384,36.837 8.064,36.837 ccw(c8.064,33.027) 4.254,33.027 cw(c1.714,33.027) 1.714,30.487 ccw(c1.714,29.217) 0.444,29.217 0.444,7.627
tKeepout:
  region: 6.5,30.587 15.057,30.587 16.7,28.944 16.7,27.644 17.8,26.544 17.8,22.644 6.8,22.644 6.5,22.944

## Dimensions
0.444,36.937 to 36.004,36.937 on Reference
34.734,6.457 to 34.734,30.587 on Reference
28.384,0.107 to 28.384,36.937 on Reference
6.794,35.54 to 29.654,35.54 on Reference
8.064,35.54 to 28.384,35.54 on Reference

## Text inside footprints (layer, text, board x,y; h text height)
LED5: bDocu "A" at 34.9,12.944 h0.6 r180; bDocu "C" at 34.9,10.325 h0.6 r180
LED6: bDocu "A" at 30.939,5.425 h0.6 r315; bDocu "C" at 32.791,7.277 h0.6 r315
LED11: bDocu "A" at 31.28,31.405 h0.6 r225; bDocu "C" at 33.133,29.552 h0.6 r225
LED12: bDocu "A" at 34.6,22.844 h0.6; bDocu "C" at 34.6,25.463 h0.6
OLED1: bDocu "30" at 28.689,15.753 h0.6 r90.02; bDocu "20" at 21.526,15.753 h0.6 r90.02; bDocu "10" at 14.574,15.753 h0.6 r90.02; bDocu "1" at 8.274,15.855 h0.6 r90.02